# EAGLE board USB French Bar 2 (EAGLE 7.6.0)

Size 51 x 50 mm. Coordinates in mm from the lower left corner, seen from the top.
Outline: 0,5 0,45 arc-90 5,50 46,50 arc-90 51,45 51,6 arc-90 45,0 5,0 arc-90 0,5
Copper layers (1*16): Top 0.035mm / dielectric 1.5mm / Bottom 0.035mm
Design rules "default": minimum track width 10mil, minimum drill 24mil, track to track 8mil, track to pad 8mil, pad to pad 8mil, via to via 8mil, smd to smd 8mil, copper to edge 40mil, drill to drill 8mil, minimum pad ring 10mil, minimum via ring 8mil, stop-mask expansion 4mil, vias tented up to drill 0mil, thermal gap 10mil

## Footprints (pad centres in the part's own frame; a part is rotated, then mirrored left to right if it is on the bottom)
1X03 = drill 1.016: 1 -2.54,0; 2 0,0; 3 2.54,0
1X01 = drill 1.016 pad 1.93 octagon: 1 0,0
SIP10 = drill 0.6 long: 1 -11.46,0; 2 -8.92,0; 3 -6.38,0; 4 -3.84,0; 5 -1.3,0; 6 1.24,0; 7 3.78,0; 8 6.32,0; 9 8.86,0; 10 11.4,0
USB-FEMALE-A-PTH = drill 0.9: D+ 5.9,1.3; D- 7.9,1.3; GND 3.4,1.3; VBUS 10.4,1.3 | drill 3: GND@1 13.5,4; GND@2 0.3,4
MOLEX_480371000 = smd 1.2 x 2: 1 3.5,2.6; 2 1,2.6; 3 -1,2.6; 4 -3.5,2.6 | drill 2.5: M1 -5.7,0; M2 5.7,0 | hole 1.1: -2.25,0; 2.25,0

## Placement (x,y rotation side)
JP1  [1X03]  39,28 0 top
JP3  [1X03]  39,22 0 top
M1  [1X01]  22,30 0 top
M2  [1X01]  22,24 0 top
M3  [1X01]  22,18 0 top
P1  [1X01]  28,18 0 top
P2  [1X01]  28,24 0 top
P3  [1X01]  28,30 0 top
RN1  [SIP10]  25.5,11.5 180 top
U$1  USB  [USB-FEMALE-A-PTH]  18.5,43 0 top
X1  USB-A  [MOLEX_480371000]  25,2.5 0 top

## Library data of the parts
JP1 JP3 M1-M3 P1-P3 X1 = adafruit
RN1 = resistor-sip
U$1 = STUNTAZ

## Nets
N$1: RN1.1 U$1.GND X1.4
N$2: M1.1 RN1.10
N$3: U$1.D+ X1.3
N$4: U$1.D- X1.2
N$5: M2.1 RN1.8
N$6: M3.1 RN1.4
N$8: JP1.2 P1.1 P2.1 P3.1
VCC: JP1.1 U$1.VBUS X1.1

## Tracks (layer width: path | path; a pad name or v marks a point on that pad's centre or on a via)
N$1  (2 unrouted)
N$2  (1 unrouted)
N$3  (1 unrouted)
N$4  (1 unrouted)
N$5  (1 unrouted)
N$6  (1 unrouted)
N$8  (3 unrouted)
VCC  (2 unrouted)

## Text on the board
tNames: AUTHORING LIGHTS / 2022 | Anthony, Dave, Eric, Fred | John, Kathie, Rick | GND | GND
bNames: PCBv1 - 2022.09 | FredericTorres.com